# Altium PCB UPRISE3D-DW01(修改logo).PCBDOC (part 2 of 2)
Units mm, origin at the board's own origin, x right, y up, seen from the top; angles counter-clockwise.
Board outline 89.99 x 190.32 mm, 2 copper layers (Top Layer, Bottom Layer); 201 components, 175 nets, 672 pads, 420 vias.
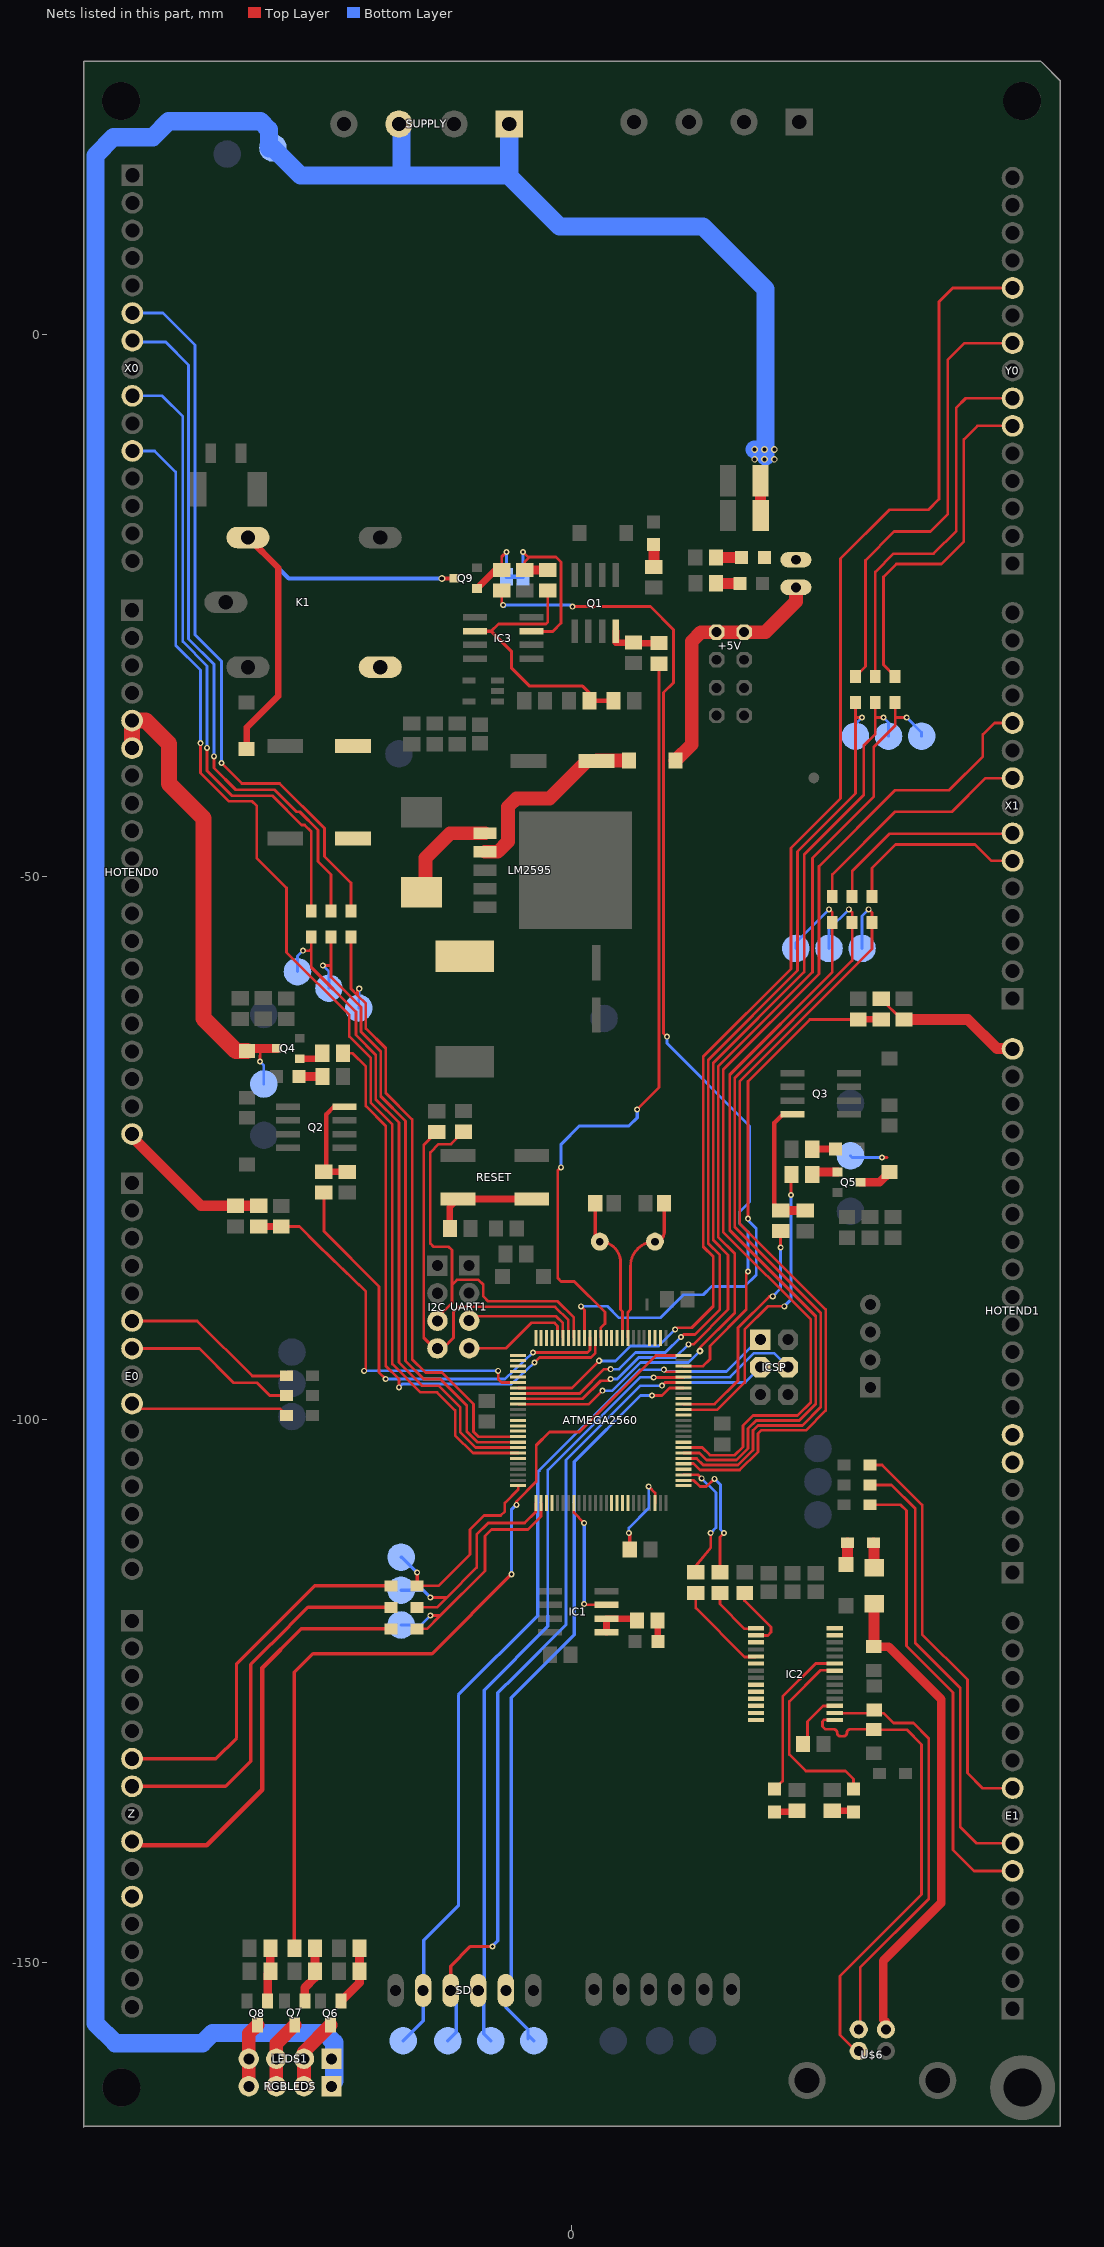
[diagram p2: the nets of this part, all layers, seen from the top]

## Via types
v1: diameter 0.555, hole 0.3, Top Layer to Bottom Layer, tented both sides, 375 vias
v2: diameter 0.656, hole 0.406, Top Layer to Bottom Layer, tented both sides, 26 vias
v3: diameter 0.606, hole 0.356, Top Layer to Bottom Layer, tented both sides, 14 vias
v4: diameter 0.6, hole 0.3, Top Layer to Bottom Layer, tented both sides, 1 vias
v5: diameter 0.61, hole 0.3, Top Layer to Bottom Layer, tented both sides, 1 vias
v6: diameter 0.61, hole 0.305, Top Layer to Bottom Layer, tented both sides, 1 vias
v7: diameter 2.184, hole 1.016, Top Layer to Bottom Layer, 1 vias
v8: diameter 0.555, hole 0.3, Top Layer to Bottom Layer, 1 vias

## Nets (pads, with @x,y where several pads share a name; then routed paths per layer and width w, separated by ;. In a path a pad name is that pad's centre, name@x,y a point inside that pad or via, vN(x,y) a via of type N, cw(c..) or ccw(c..) an arc to the next point about the centre after c; other vN are vias at no path point) (continued)
LFAN0: D7.A HOTEND0.5 HOTEND0.6 Q4.3 TP9.TP | length 45.1
  Top Layer w0.254: v1(-28.727,-67) -28.703,-65.795 -28.702,-65.735
  Top Layer w0.813: D7.A@-29.907,-66.033 -29.669,-65.795 -28.703,-65.795 Q4.3@-27.166,-65.795
  Top Layer w1.5: HOTEND0.6@-40.513,-38.125 HOTEND0.5@-40.513,-35.585 -39.243,-35.585 -37.109,-37.719 -37.109,-41.402 -33.934,-44.577 -33.934,-63.043 -30.944,-66.033 D7.A@-29.907,-66.033
  Bottom Layer w0.254: v1(-28.727,-67) -28.372,-67.356 TP9.TP@-28.372,-69.074
LFAN1: D9.A HOTEND1.5 HOTEND1.6 Q5.3 TP10.TP | length 6.5
  Top Layer w0.305: v1(28.575,-75.84) 29.032,-75.84
  Top Layer w0.813: Q5.3@26.59,-78.128 28.351,-78.128 D9.A@29.288,-77.191
  Bottom Layer w0.254: TP10.TP@25.679,-75.687 25.832,-75.84 v1(28.575,-75.84)
LMIN: C8.+ D2.C LM2595.2 | length 18.6
  Top Layer w1.27: LM2595.2@-7.998,-47.68 -6.816,-47.68 -5.867,-46.731 -5.867,-43.531 -5.105,-42.769 -2.057,-42.769 1.39,-39.322 C8.+@2.273,-39.322 2.316,-39.279 D2.C@5.264,-39.279
MISO: ATMEGA2560.22 ICSP.1 SD.2 TP20.TP | length 84.9
  Top Layer w0.254: v1(8.484,-95.398) 8.691,-95.58 ATMEGA2560.22@10.297,-95.58
  Bottom Layer w0.254: -2.972,-104.643 6.274,-95.398 v1(8.484,-95.398) 8.534,-95.575 14.249,-95.575 17.203,-92.622 ICSP.1@17.377,-92.622
  Bottom Layer w0.305: TP20.TP@-15.535,-157.228 -13.699,-155.391 SD.2@-13.699,-152.585 SD.2@-13.62,-152.585 ; SD.2@-13.64,-152.273 -13.64,-147.98 -10.439,-144.78 -10.439,-125.37 -3.124,-118.054 -3.124,-104.796 -2.972,-104.643
MLED: ATMEGA2560.83 IC1.3 | length 11.8
  Top Layer w0.254: ATMEGA2560.83@0.188,-107.695 0.188,-108.565 v1(1.143,-109.52) ; v1(1.143,-116.988) 1.218,-117.063 IC1.3@3.197,-117.063
  Bottom Layer w0.305: v1(1.143,-116.988) v1(1.143,-109.52)
MOSI: ATMEGA2560.21 ICSP.4 SD.4 TP17.TP | length 86.1
  Top Layer w0.203: ATMEGA2560.21@10.276,-96.109 ATMEGA2560.21@10.297,-96.088
  Top Layer w0.254: v1(7.544,-96.109) ATMEGA2560.21@10.276,-96.109
  Bottom Layer w0.203: v1(7.544,-96.109) 7.87,-96.088
  Bottom Layer w0.254: -2.21,-118.054 -2.21,-104.643 6.346,-96.088 7.544,-96.088 7.87,-96.088 14.575,-96.088 16.789,-93.874 18.629,-93.874 ICSP.4@19.917,-95.162
  Bottom Layer w0.305: SD.4@-8.576,-152.542 SD.4@-8.619,-152.585 -8.992,-152.213 -8.619,-152.213 SD.4@-8.576,-152.213 ; SD.4@-8.111,-152.585 -8.111,-156.575 TP17.TP@-7.458,-157.228 ; SD.4@-8.068,-152.213 -8.068,-124.912 -2.21,-119.054 -2.21,-118.054
N$1: C19.1 IC2.2 | length 6.2
  Top Layer w0.254: C19.1@15.924,-115.956 15.924,-116.681 18.364,-119.121 18.364,-119.578 18.059,-119.883 16.976,-119.883 IC2.2@16.967,-119.875
N$2: ATMEGA2560.98 C6.1 | length 8.4
  Top Layer w0.254: v1(7.087,-106.167) 7.681,-106.761 ATMEGA2560.98@7.681,-107.695
  Top Layer w0.305: v1(5.258,-110.434) 5.336,-110.513 C6.1@5.336,-111.955
  Bottom Layer w0.254: v1(5.258,-110.434) 5.258,-109.977 7.087,-108.148 v1(7.087,-106.167)
N$3: ATMEGA2560.35
N$4: ATMEGA2560.14
N$5: L12.1 X0.6 | length 67.1
  Top Layer w0.254: v1(-32.283,-39.497) -30.404,-41.377 -26.919,-41.377 -22.784,-45.512 -22.784,-48.103 -20.345,-50.541 L12.1@-20.345,-53.151
  Bottom Layer w0.254: X0.6@-40.488,1.956 -37.668,1.956 -34.722,-0.991 -34.722,-27.686 -32.283,-30.124 v1(-32.283,-39.497)
N$6: IC2.23 TXLED.C | length 14.9
  Top Layer w0.254: TXLED.C@18.691,-134.036 19.431,-133.296 19.431,-125.522 22.479,-122.474 IC2.23@24.218,-122.474
N$7: IC2.22 RXLED.C | length 18
  Top Layer w0.254: IC2.22@24.218,-123.124 24.176,-123.084 22.936,-123.084 20.041,-125.979 20.041,-130.856 21.565,-132.38 25.222,-132.38 25.951,-133.109 RXLED.C@25.951,-134.036
N$8: IC2.3
N$9: LEDS1.2 Q6.3 RGBLEDS.2 | length 6.7
  Top Layer w1.27: RGBLEDS.2@-24.681,-161.421 LEDS1.2@-24.681,-158.894 -24.681,-158.239 Q6.3@-22.218,-155.776
N$10: LEDS1.3 Q7.3 RGBLEDS.3 | length 6.4
  Top Layer w1.27: RGBLEDS.3@-27.221,-161.421 LEDS1.3@-27.221,-158.894 -27.221,-157.466 Q7.3@-25.523,-155.768
N$11: LEDS1.4 Q8.3 RGBLEDS.4 | length 6.6
  Top Layer w1.016: LEDS1.4@-29.761,-159.514 LEDS1.4@-29.761,-158.894
  Top Layer w1.27: RGBLEDS.4@-29.761,-161.421 LEDS1.4@-29.761,-158.894 -29.761,-156.561 Q8.3@-28.97,-155.771
N$12: IC2.11
N$13: R32.2 RESET.B RESET.B' | length 9.8
  Top Layer w0.61: R32.2@-11.237,-82.393 -11.237,-80.419 RESET.B'@-10.487,-79.668 RESET.B@-3.687,-79.668
N$14: IC2.9
N$15: IC2.10
N$16: IC2.6
N$17: IC2.13
N$18: IC2.14
N$19: IC2.12
N$20: IC2.27
N$21: IC2.28
N$22: ATMEGA2560.47
N$23: D8.A L2.2 | length 2.1
  Top Layer w1.016: D8.A@25.274,-113.351 25.394,-113.231 L2.2@25.394,-111.349
N$24: ATMEGA2560.78
N$26: IC1.1 IC1.2 R3.2 | length 4.1
  Top Layer w0.61: IC1.1@3.197,-119.603 IC1.2@3.197,-118.333 5.835,-118.333 R3.2@6.005,-118.502
N$27: Q6.1 R18.1 R20.1 | length 5.6
  Top Layer w0.813: Q6.1@-21.268,-153.576 -19.548,-151.855 R18.1@-19.548,-150.827 R20.1@-19.548,-148.693
N$28: R3.1 STAT.A | length 1.9
  Top Layer w0.61: R3.1@7.904,-118.502 7.904,-119.95 STAT.A@7.929,-120.432
N$29: ATMEGA2560.53
N$31: Q7.1 R21.1 R31.1 | length 5.3
  Top Layer w0.813: Q7.1@-24.573,-153.568 -24.613,-153.528 -24.613,-152.351 -23.663,-151.401 R31.1@-23.663,-150.827 R21.1@-23.663,-148.693
N$32: Q8.1 R22.1 R40.1 | length 5
  Top Layer w0.813: Q8.1@-28.021,-153.571 -28.021,-151.07 R40.1@-27.777,-150.827 R22.1@-27.777,-148.693
N$33: ATMEGA2560.54
N$34: L13.1 X0.7 | length 64
  Top Layer w0.254: v1(-32.969,-38.887) -32.969,-39.954 -30.963,-41.961 -27.381,-41.961 -25.352,-43.99 -25.068,-43.99 -23.393,-45.664 -23.393,-48.56 -22.174,-49.779 L13.1@-22.174,-53.151
  Bottom Layer w0.254: X0.7@-40.361,-0.711 -37.414,-0.711 -35.306,-2.819 -35.306,-28.067 -32.969,-30.404 v1(-32.969,-38.887)
N$35: L14.1 X0.9 | length 58.3
  Top Layer w0.254: v1(-33.604,-38.1) -33.604,-40.208 -31.293,-42.52 -27.584,-42.52 -24.897,-45.207 -24.613,-45.207 -24.003,-45.817 L14.1@-24.003,-53.151
  Bottom Layer w0.254: X0.9@-40.488,-5.664 -37.744,-5.664 -35.839,-7.569 -35.839,-28.321 -33.604,-30.556 v1(-33.604,-38.1)
N$36: L18.1 Y0.6 | length 32.8
  Top Layer w0.254: L18.1@29.794,-31.51 28.727,-30.444 28.727,-22.347 29.906,-21.169 34.051,-21.169 36.119,-19.101 36.119,-9.703 37.389,-8.433 Y0.6@40.615,-8.433
N$37: L19.1 Y0.7 | length 35.5
  Top Layer w0.254: L19.1@27.965,-31.51 27.965,-21.89 29.642,-20.214 33.33,-20.214 35.433,-18.11 35.433,-6.756 36.297,-5.893 Y0.7@40.615,-5.893
N$38: ATMEGA2560.9
N$39: L20.1 Y0.9 | length 41.3
  Top Layer w0.254: L20.1@26.137,-31.51 27.051,-30.596 27.051,-20.823 29.705,-18.169 33.038,-18.169 34.646,-16.561 34.646,-2.337 36.17,-0.813 Y0.9@40.615,-0.813
N$40: L15.1 X1.6 | length 17.1
  Top Layer w0.254: L15.1@27.661,-51.78 27.661,-49.17 29.816,-47.015 37.159,-47.015 38.659,-48.514 X1.6@40.615,-48.514
N$41: L16.1 X1.7 | length 18.5
  Top Layer w0.254: L16.1@25.832,-51.78 25.832,-49.474 29.296,-46.01 X1.7@40.579,-46.01
N$42: L17.1 X1.9 | length 22.3
  Top Layer w0.254: L17.1@24.003,-51.78 24.003,-49.779 29.794,-43.988 35.031,-43.988 38.125,-40.894 X1.9@40.615,-40.894
N$43: E0.6 L6.2 | length 16.6
  Top Layer w0.254: E0.6@-40.513,-90.907 -34.519,-90.907 -29.435,-95.99 -26.27,-95.99 -26.151,-95.99 L6.2@-26.27,-95.956
N$44: E0.7 L7.2 | length 16
  Top Layer w0.254: E0.7@-40.513,-93.447 -34.315,-93.447 -31.166,-96.596 -29.019,-96.596 -27.831,-97.785 L7.2@-26.27,-97.785
N$45: E0.9 L8.2 | length 14.2
  Top Layer w0.254: E0.9@-40.253,-98.99 -26.894,-98.99 L8.2@-26.27,-99.614
N$46: ATMEGA2560.17
N$47: ATMEGA2560.55
N$48: F3.2 L2.1 | length 2.3
  Top Layer w1.016: L2.1@27.794,-111.349 27.855,-111.41 F3.2@27.855,-113.639
N$49: IC3.2 R1.2 R42.1 R44.1 | length 25.2
  Top Layer w0.254: -7.417,-27.351 -6.756,-26.691 -2.388,-26.691 -2.21,-26.513 R44.1@-2.21,-23.602
  Top Layer w0.305: IC3.2@-8.925,-27.351 -7.417,-27.351 -5.563,-29.205 -5.563,-30.729 -3.886,-32.406 0.991,-32.406 1.636,-33.051 R42.1@1.636,-33.777
  Top Layer w0.406: R42.1@1.636,-33.777 R1.2@3.851,-33.777
N$50: ATMEGA2560.4
N$54: L3.1 Z.6 | length 34.4
  Top Layer w0.305: Z.6@-40.513,-131.242 -32.791,-131.242 -30.886,-129.337 -30.886,-122.499 -23.698,-115.311 L3.1@-16.668,-115.311
N$55: L4.1 Z.7 | length 35.9
  Top Layer w0.305: Z.7@-40.513,-133.782 -31.902,-133.782 -29.591,-131.47 -29.591,-122.555 -27.728,-120.692 -27.707,-120.692 -24.308,-117.292 L4.1@-16.668,-117.292
N$56: L5.1 Z.9 | length 38.5
  Top Layer w0.305: -26.84,-121.196 -24.917,-119.274 L5.1@-16.668,-119.274
  Top Layer w0.406: Z.9@-40.361,-139.217 -33.63,-139.217 -28.524,-134.112 -28.524,-122.88 -26.84,-121.196
N$57: E1.9 L11.1 | length 37.5
  Top Layer w0.254: L11.1@27.489,-104.186 28.596,-104.186 32.283,-107.874 32.283,-119.786 36.449,-123.952 36.449,-132.563 37.846,-133.96 E1.9@40.615,-133.96
N$58: E1.7 L10.1 | length 41.6
  Top Layer w0.254: L10.1@27.489,-106.015 29.459,-106.015 31.648,-108.204 31.648,-120.574 35.789,-124.714 35.789,-137.516 37.313,-139.04 E1.7@40.615,-139.04
N$59: E1.6 L9.1 | length 42.9
  Top Layer w0.254: L9.1@27.489,-107.844 30.297,-107.844 30.836,-108.382 30.836,-120.853 35.128,-125.146 35.128,-139.649 37.059,-141.58 E1.6@40.615,-141.58
N$63: LED1.C R2.2 | length 2
  Top Layer w1.016: LED1.C@7.531,-19.373 7.556,-20.313 R2.2@7.556,-21.422
N$66: Q1.4 R6.1 R7.1 | length 5.1
  Top Layer w0.61: Q1.4@4.08,-27.371 Q1.4@4.071,-27.362 4.071,-28.402 R7.1@5.682,-28.402 5.682,-28.451 R6.1@8.034,-28.451
N$69: ATMEGA2560.93
N$73: ATMEGA2560.92
N$74: ATMEGA2560.91
N$75: ATMEGA2560.90
N$76: C20.1 IC2.17 | length 5.3
  Top Layer w0.254: C20.1@21.301,-129.888 21.717,-129.473 21.717,-127.808 23.15,-126.375 IC2.17@24.218,-126.375
N$77: ATMEGA2560.51
N$78: ATMEGA2560.52
N$81: R33.1 TXLED.A | length 2.1
  Top Layer w0.61: TXLED.A@18.691,-136.136 R33.1@20.654,-136.136
  Top Layer w0.813: R33.1@20.654,-136.136 R33.1@20.755,-136.034
N$82: R34.1 RXLED.A | length 2
  Top Layer w0.61: R34.1@24.01,-136.034 25.85,-136.034 RXLED.A@25.951,-136.136
N$83: ATMEGA2560.70
N$90: Q4.1 R14.1 | length 2.3
  Top Layer w0.61: Q4.1@-25.065,-66.745 -23.489,-66.745 R14.1@-22.99,-66.245
N$91: LED2.C R8.2 | length 2.2
  Top Layer w0.813: LED2.C@-25.122,-68.384 R8.2@-22.97,-68.384
N$99: Q2.4 R9.1 R10.1 | length 9.5
  Top Layer w0.406: R9.1@-22.838,-77.162 -22.631,-76.956 -22.631,-71.877 -21.911,-71.157 Q2.4@-20.948,-71.157
  Top Layer w0.61: R9.1@-22.838,-77.162 -22.825,-77.176 R10.1@-20.697,-77.176
N$100: D4.A K1.2 Q9.3 | length 42.4
  Top Layer w0.406: v2(-11.963,-22.5) Q9.3@-10.87,-22.5
  Top Layer w0.61: D4.A@-29.953,-38.218 -29.953,-36.222 -27.051,-33.32 -27.051,-21.516 K1.2@-29.84,-18.726 ; Q9.3@-10.87,-22.5 Q9.3@-10.841,-22.47
  Bottom Layer w0.406: K1.2@-29.84,-18.726 -26.067,-22.5 v2(-11.963,-22.5)
N$101: ATMEGA2560.28
N$102: LED3.C R11.2 | length 2.2
  Top Layer w0.406: R11.2@22.159,-75.096 R11.2@22.172,-75.059
  Top Layer w0.61: R11.2@22.172,-75.059 LED3.C@24.285,-75.059
N$103: Q3.4 R12.1 R13.1 | length 12.6
  Top Layer w0.406: R12.1@19.242,-80.733 18.669,-80.161 18.669,-72.639 19.433,-71.876 Q3.4@20.328,-71.876
  Top Layer w0.813: R12.1@19.242,-80.733 19.251,-80.742 R13.1@21.525,-80.743
N$104: ATMEGA2560.48
N$105: ATMEGA2560.49
N$106: ATMEGA2560.50
N$107: Q5.1 R15.1 | length 2.5
  Top Layer w0.813: R15.1@22.159,-77.414 22.304,-77.178 Q5.1@24.49,-77.178
N$109: ATMEGA2560.29
N$113: ATMEGA2560.1
N$114: ATMEGA2560.63
N$122: ATMEGA2560.64
N$125: ATMEGA2560.27
N$126: ATMEGA2560.65
N$131: ATMEGA2560.79
N$141: ATMEGA2560.36
N$142: ATMEGA2560.37
N$147: ATMEGA2560.42
N$161: PWR24.C R38.2 | length 2.4
  Top Layer w1.016: R38.2@13.279,-20.571 13.29,-20.561 PWR24.C@15.639,-20.561
N$162: PWR5.C R39.2 | length 2.2
  Top Layer w1.016: R39.2@13.294,-22.939 13.32,-22.964 PWR5.C@15.487,-22.964
OUT: D1.C L1.A LM2595.1 | length 9.7
  Top Layer w1.016: D1.C@-13.859,-51.424 D1.C@-13.487,-50.443
  Top Layer w1.27: D1.C@-13.487,-50.443 -13.487,-48.255 -11.21,-45.978 LM2595.1@-7.998,-45.978
PWM_HOTBED: ATMEGA2560.38 R6.2 | length 71.3
  Top Layer w0.254: v1(-0.991,-76.754) -1.295,-77.059 -1.295,-86.965 -0.991,-87.27 0.229,-87.27 3.048,-90.089 3.048,-91.156 2.677,-91.527 ATMEGA2560.38@2.677,-92.455 ; v1(6.02,-71.42) 8.034,-69.406 R6.2@8.034,-30.351
  Bottom Layer w0.305: v1(-0.991,-76.754) -0.991,-74.62 0.686,-72.944 5.258,-72.944 6.02,-72.182 v1(6.02,-71.42)
PWM_HOTEND0: ATMEGA2560.40 R9.2 | length 40.6
  Top Layer w0.254: R9.2@-22.838,-79.062 -22.838,-82.643 -17.755,-87.727 -17.755,-95.652 v1(-17.145,-96.261) ; v1(-3.581,-93.823) 1.448,-93.823 1.686,-93.584 ATMEGA2560.40@1.686,-92.455
  Bottom Layer w0.254: v1(-17.145,-96.261) -6.172,-96.261 v1(-3.581,-93.823)
PWM_HOTEND1: ATMEGA2560.16 R12.2 | length 21.5
  Top Layer w0.254: ATMEGA2560.16@10.297,-98.577 13.153,-98.577 15.316,-96.414 15.316,-91.537 18.212,-88.641 v1(18.517,-88.641) ; v1(19.242,-84.132) R12.2@19.242,-82.633
  Bottom Layer w0.254: v1(18.517,-88.641) 19.242,-87.916 v1(19.242,-84.132)
PWM_LFAN0: ATMEGA2560.39 R14.2 | length 54.2
  Top Layer w0.254: R14.2@-21.09,-66.245 -21.083,-66.238 -20.193,-66.238 -18.974,-67.458 -18.974,-71.115 -17.145,-72.944 -17.145,-95.042 -15.926,-96.261 v1(-15.926,-97.023) ; v1(-3.429,-94.737) -2.972,-94.28 1.753,-94.28 2.169,-93.864 ATMEGA2560.39@2.169,-92.455
  Bottom Layer w0.254: v1(-15.926,-97.023) -15.621,-96.718 -5.563,-96.718 v1(-3.429,-94.737)
PWM_LFAN1: ATMEGA2560.15 R15.2 | length 28.6
  Top Layer w0.254: ATMEGA2560.15@10.297,-99.085 10.301,-99.081 13.411,-99.081 15.926,-96.566 15.926,-91.689 18.059,-89.556 v1(19.583,-89.556)
  Top Layer w0.305: v1(20.193,-79.293) 20.193,-77.414 R15.2@20.259,-77.414
  Bottom Layer w0.305: v1(19.583,-89.556) 20.193,-88.946 v1(20.193,-79.293)
R-PWM: ATMEGA2560.25 R21.2 | length 79
  Top Layer w0.254: v1(-5.105,-107.844) -5.105,-107.539 -3.277,-105.71 -3.277,-102.357 -2.057,-101.138 0.686,-101.138 7.743,-94.081 ATMEGA2560.25@10.297,-94.081
  Top Layer w0.305: R21.2@-25.563,-148.693 -25.563,-123.272 -23.851,-121.56 -12.878,-121.56 v1(-5.563,-114.244)
  Bottom Layer w0.305: v1(-5.563,-114.244) -5.563,-108.301 v1(-5.105,-107.844)
RELAY: ATMEGA2560.23 R19.2 | length 94
  Top Layer w0.254: R19.2@-6.451,-23.602 -6.451,-24.811 v1(-6.325,-24.938) ; v1(0.076,-25.09) 7.239,-25.09 9.373,-27.224 9.373,-32.101 8.458,-33.015 8.458,-64.41 v1(8.763,-64.714) ; ATMEGA2560.23@10.297,-95.072 12.086,-95.072 12.725,-94.432 12.725,-93.213 16.078,-89.86 16.078,-86.508 v1(16.231,-86.355)
  Bottom Layer w0.254: v1@-6.172,-25.09 v1(-6.325,-24.938) -0.076,-24.938 v1(0.076,-25.09) ; v1(8.763,-64.714) 8.763,-65.324 16.383,-72.944 16.383,-79.954 15.469,-80.869 15.469,-81.936 16.231,-82.698 v1(16.231,-86.355)
RELAYINA: IC3.7 Q9.1 R19.1 R43.2 R44.2 SJ1.1 SJ1.2 | length 27
  Top Layer w0.254: R19.1@-6.451,-21.702 -6.451,-20.493 v1(-6.02,-20.061) ; v1(-4.496,-20.061) -4.039,-20.518 -3.886,-20.518 ; R43.2@-4.343,-21.702 -4.343,-20.976 -3.886,-20.518 ; IC3.7@-3.725,-27.351 -3.699,-27.376 -1.753,-27.376 -0.991,-26.614 -0.991,-20.976 -1.448,-20.518 -3.886,-20.518
  Top Layer w0.61: Q9.1@-8.741,-23.42 -7.023,-21.702 R19.1@-6.451,-21.702
  Top Layer w0.813: R43.2@-4.343,-21.702 R44.2@-2.21,-21.702
  Bottom Layer w0.254: SJ1.2@-6.02,-22.347 v1(-6.02,-20.061) ; SJ1.1@-4.496,-22.347 v1(-4.496,-20.061)
  Bottom Layer w0.406: SJ1.2@-6.02,-22.347 SJ1.1@-4.496,-22.347
RX: IC2.1 R35.2 | length 5.3
  Top Layer w0.254: R35.2@13.649,-115.956 13.649,-116.997 15.926,-119.274 16.919,-119.274 IC2.1@16.967,-119.225
RX1: ATMEGA2560.45 UART1.3 | length 10.4
  Top Layer w0.254: UART1.3@-9.45,-90.88 -9.04,-90.47 -1.448,-90.47 -0.828,-91.089 ATMEGA2560.45@-0.828,-92.455
SCL: ATMEGA2560.43 I2C.3 R4.2 | length 36.9
  Top Layer w0.254: I2C.3@-12.379,-90.894 -12.379,-90.581 -11.049,-89.251 -11.049,-87.574 ; R4.2@-9.98,-73.475 -11.125,-74.62 -12.268,-74.62 -13.03,-75.382 -13.03,-83.764 -12.725,-84.069 -11.354,-84.069 -11.049,-84.374 -11.049,-87.574 ; ATMEGA2560.43@0.188,-92.455 0.188,-90.581 -1.295,-89.098 -7.696,-89.098 -8.153,-88.641 -8.153,-87.574 -8.611,-87.117 -10.592,-87.117 -11.049,-87.574
SCLK: ATMEGA2560.20 ICSP.3 SD.3 TP19.TP | length 83
  Top Layer w0.254: v1(8.306,-96.871) 8.606,-96.57 ATMEGA2560.20@10.297,-96.57
  Top Layer w0.305: SD.3@-11.159,-152.585 -11.167,-152.578 -11.167,-150.37 -9.338,-148.541 v1(-7.316,-148.54)
  Bottom Layer w0.254: -0.533,-108.301 -0.533,-103.729 6.325,-96.871 v1(8.306,-96.871) 8.611,-96.566 10.301,-96.566 ; 10.297,-96.57 10.301,-96.566 ; ICSP.3@17.377,-95.162 15.974,-96.566 10.301,-96.566
  Bottom Layer w0.305: TP19.TP@-11.421,-157.228 -10.651,-156.458 SD.3@-10.651,-152.585 ; v1(-7.316,-148.54) -6.808,-148.032 -6.808,-125.172 -5.177,-123.541 -5.172,-123.541 -0.533,-118.902 -0.533,-108.301
SDA: ATMEGA2560.44 I2C.4 R5.2 | length 38.3
  Top Layer w0.254: R5.2@-12.436,-73.488 -13.64,-74.691 -13.64,-92.451 -12.657,-93.434 I2C.4@-12.379,-93.434 -11.88,-93.434 -10.897,-92.451 -10.897,-90.064 -10.439,-89.606 -1.549,-89.606 -0.32,-90.835 ATMEGA2560.44@-0.32,-92.455
SDSS: ATMEGA2560.19 SD.5 TP16.TP | length 70.1
  Top Layer w0.254: v1(7.391,-97.785) 8.306,-97.785 9.013,-97.078 ATMEGA2560.19@10.297,-97.078
  Bottom Layer w0.254: 0.229,-103.881 6.325,-97.785 v1(7.391,-97.785)
  Bottom Layer w0.305: SD.5@-6.079,-152.585 -6.079,-154.119 -4.039,-156.159 TP16.TP@-4.039,-156.685 ; SD.5@-5.571,-152.585 -5.571,-125.616 0.229,-119.816 0.229,-103.881 ; TP16.TP@-4.039,-157.074 TP16.TP@-4.039,-156.685 ; TP16.TP@-3.496,-157.228 TP16.TP@-4.039,-156.685
SUPPLY: C12.+ C13.+ C14.1 C16.1 K1.S LEDS1.1 PWR24.A RGBLEDS.1 SUPPLY.1 SUPPLY.3 TP2.TP VCC2.1 | length 298.2
  Top Layer w1.016: C16.1@17.399,-16.694 C14.1@17.398,-13.5
  Bottom Layer w1.676: TP2.TP@-27.889,17.145 -27.889,17.17 -27.889,18.847 -28.677,19.634 -37.135,19.634 -38.608,18.161 -42.215,18.161 -43.891,16.485 -43.891,-155.626 -42.062,-157.455 -34.036,-157.455 -33.096,-156.515 -22.758,-156.515 -21.895,-157.378 -21.895,-158.894 RGBLEDS.1@-21.895,-160.934 ; TP2.TP@-27.534,17.17 -24.994,14.63 -15.469,14.63 ; SUPPLY.3@-15.697,19.355 -15.697,14.859 -15.469,14.63 ; -5.969,14.63 -15.469,14.63 ; SUPPLY.1@-5.766,19.38 -5.766,14.58 -1.118,9.931 12.09,9.931 17.856,4.166 17.856,-10.612 v3@17.856,-11.252 ; v3(16.84,-10.612) v3(17.755,-10.612)
  other v3: 16.84,-11.527 17.755,-11.527 18.669,-11.527 18.669,-10.612
TX: IC2.5 R36.2 | length 8.8
  Top Layer w0.254: R36.2@11.43,-115.956 11.43,-117.369 15.926,-121.864 16.928,-121.864 IC2.5@16.967,-121.824
TX1: ATMEGA2560.46 UART1.4 | length 10.3
  Top Layer w0.254: UART1.4@-9.45,-93.42 -6.074,-93.42 -3.734,-91.08 -1.6,-91.08 -1.311,-91.369 ATMEGA2560.46@-1.311,-92.455
UART_N: ATMEGA2560.3 R36.1 | length 11.7
  Top Layer w0.254: ATMEGA2560.3@10.297,-105.079 11.638,-105.079 v1(11.963,-105.405) ; R36.1@11.43,-114.056 11.43,-113.482 12.802,-111.806 v1(12.802,-110.434)
  Bottom Layer w0.254: v1(11.963,-105.405) 13.284,-106.726 13.284,-109.952 v1(12.802,-110.434)
UART_P: ATMEGA2560.2 R35.1 | length 12.5
  Top Layer w0.254: ATMEGA2560.2@10.297,-105.587 11.231,-105.587 11.811,-106.167 12.421,-106.167 v1(13.138,-105.45) ; R35.1@13.649,-114.056 13.649,-110.806 v1(14.021,-110.434)
  Bottom Layer w0.254: v1(13.138,-105.45) 13.691,-106.002 13.691,-110.104 v1(14.021,-110.434)
USBD+_P: IC2.15 R23.1 U$6.D+ | length 44.5
  Top Layer w0.203: IC2.15@24.199,-127.656 IC2.15@24.218,-127.675 ; 24.447,-128.868 24.447,-128.829 ; 25.345,-128.868 25.345,-128.829 ; R23.1@27.813,-128.537 R23.1@27.846,-128.57
  Top Layer w0.254: IC2.15@24.199,-127.656 23.241,-127.656 23.089,-127.808 23.089,-128.265 23.36,-128.537 24.155,-128.537 cw(c24.155,-128.829) 24.447,-128.829 ; 24.447,-128.868 ccw(c24.74,-128.868) 24.74,-129.16 25.053,-129.16 ccw(c25.053,-128.868) 25.345,-128.868 ; 25.345,-128.829 cw(c25.637,-128.829) 25.637,-128.537 R23.1@27.813,-128.537 ; U$6.D+@26.441,-158.166 26.187,-158.166 24.714,-156.693 24.714,-151.257 32.233,-143.739 32.233,-129.921 30.882,-128.57 R23.1@27.846,-128.57
USBD-_N: IC2.16 R24.1 U$6.D- | length 39.2
  Top Layer w0.254: IC2.16@24.218,-127.025 24.239,-127.046 27.864,-127.046 28.727,-127.046 29.642,-127.96 31.466,-127.96 32.893,-129.388 32.893,-144.17 26.568,-150.495 26.568,-156.185 U$6.D-@26.568,-156.362
VBUS: F3.1 R25.1 U$6.VBUS | length 44.3
  Top Layer w0.813: R25.1@27.813,-120.917 29.197,-120.917 34.036,-125.755 34.036,-144.526 28.702,-149.86 28.702,-155.27 U$6.VBUS@28.956,-155.524
  Top Layer w1.016: R25.1@27.813,-120.917 27.855,-120.875 F3.1@27.855,-116.947
VCC2: +5V.1 +5V.3 D2.A VCC2.2 | length 24.1
  Top Layer w0.356: +5V.1@13.32,-27.417 +5V.1@13.345,-27.443
  Top Layer w1.27: D2.A@9.564,-39.279 11.049,-37.794 11.049,-28.291 11.897,-27.443 +5V.1@13.345,-27.443 +5V.3@15.885,-27.443 17.841,-27.443 20.65,-24.633 VCC2.2@20.65,-23.312
X0-!EN: ATMEGA2560.67 L13.2 TP22.TP | length 59.8
  Top Layer w0.254: v1(-22.936,-58.161) -22.174,-58.161 ; L13.2@-22.174,-55.551 -22.174,-58.161 ; ATMEGA2560.67@-4.943,-102.082 -8.674,-102.082 -9.677,-101.079 -9.677,-98.7 -12.116,-96.261 -13.64,-96.261 -15.316,-94.585 -15.316,-72.487 -17.602,-70.201 -17.602,-66.086 -19.431,-64.257 -19.431,-61.971 -22.174,-59.228 -22.174,-58.161
  Bottom Layer w0.254: v1(-22.936,-58.161) -22.377,-58.72 TP22.TP@-22.377,-60.244
X0-DIR: ATMEGA2560.68 L14.2 TP23.TP | length 61.1
  Top Layer w0.254: v1(-24.765,-56.79) -24.155,-56.79 -24.003,-56.637 ; L14.2@-24.003,-55.551 -24.003,-56.637 ; ATMEGA2560.68@-4.943,-102.565 -8.86,-102.565 -10.287,-101.138 -10.287,-98.852 -12.268,-96.871 -13.792,-96.871 -15.926,-94.737 -15.926,-72.639 -18.059,-70.506 -18.059,-66.391 -19.888,-64.562 -19.888,-62.428 -24.003,-58.314 -24.003,-56.637
  Bottom Layer w0.254: TP23.TP@-25.273,-58.72 -25.273,-57.298 v1(-24.765,-56.79)
X0-STEP: ATMEGA2560.66 L12.2 TP21.TP | length 57.9
  Top Layer w0.254: L12.2@-20.345,-55.551 -20.345,-60.295 -19.736,-60.904 ; v1(-19.583,-60.295) -19.736,-60.447 -19.736,-60.904 ; ATMEGA2560.66@-4.943,-101.574 -8.611,-101.574 -9.068,-101.117 -9.068,-98.547 -11.963,-95.652 -13.487,-95.652 -14.707,-94.432 -14.707,-72.334 -17.145,-69.896 -17.145,-65.781 -18.974,-63.952 -18.974,-61.666 -19.736,-60.904
  Bottom Layer w0.254: TP21.TP@-19.634,-62.073 v1(-19.583,-60.295)
X0-STOP: ATMEGA2560.69 X0.11 | length 112.9
  Top Layer w0.254: v1(-34.214,-37.668) -34.214,-40.411 -31.598,-43.028 -29.439,-43.028 -29.035,-43.431 -29.035,-48.253 -26.289,-50.998 -26.289,-56.942 -20.498,-62.733 -20.498,-64.714 -18.517,-66.696 -18.517,-70.81 -16.535,-72.792 -16.535,-94.89 -13.945,-97.48 -12.421,-97.48 -10.744,-99.157 -10.744,-101.443 -9.114,-103.073 ATMEGA2560.69@-4.943,-103.073
  Bottom Layer w0.254: X0.11@-40.488,-10.744 -38.43,-10.744 -36.5,-12.675 -36.5,-28.651 -34.214,-30.937 v1(-34.214,-37.668)
X1-!EN: ATMEGA2560.6 L16.2 TP25.TP | length 74.3
  Top Layer w0.254: ATMEGA2560.6@10.297,-103.581 10.301,-103.576 11.506,-103.576 12.116,-104.186 15.316,-104.186 16.688,-102.814 16.688,-100.986 17.145,-100.528 21.26,-100.528 22.936,-98.852 22.936,-90.165 15.011,-82.24 15.011,-68.524 25.832,-57.704 L16.2@25.832,-54.179 25.832,-53.284 v1(25.527,-52.98)
  Bottom Layer w0.254: TP25.TP@23.698,-56.586 23.698,-54.808 v1(25.527,-52.98)
X1-DIR: ATMEGA2560.7 L17.2 TP26.TP | length 73.9
  Top Layer w0.254: ATMEGA2560.7@10.297,-103.073 11.765,-103.073 12.421,-103.729 15.164,-103.729 16.231,-102.662 16.231,-100.833 16.993,-100.071 20.955,-100.071 22.479,-98.547 22.479,-90.47 14.554,-82.545 14.554,-68.22 24.003,-58.771 L17.2@24.003,-54.179 ; L17.2@23.698,-53.875 L17.2@24.003,-54.179 ; v1(23.698,-52.98) 24.003,-53.284 L17.2@24.003,-54.179
  Bottom Layer w0.254: TP26.TP@20.65,-56.586 20.65,-56.028 v1(23.698,-52.98)
X1-STEP: ATMEGA2560.5 L15.2 TP24.TP | length 75.1
  Top Layer w0.254: ATMEGA2560.5@10.297,-104.063 10.327,-104.034 11.201,-104.034 11.811,-104.643 15.469,-104.643 17.145,-102.967 17.145,-101.29 17.45,-100.986 21.565,-100.986 23.393,-99.157 23.393,-89.86 15.469,-81.936 15.469,-68.829 27.661,-56.637 L15.2@27.661,-54.179 27.661,-53.284 v1(27.356,-52.98)
  Bottom Layer w0.254: TP24.TP@26.746,-56.586 26.746,-53.589 v1(27.356,-52.98)
X1-STOP: ATMEGA2560.8 X1.11 | length 96.1
  Top Layer w0.254: ATMEGA2560.8@10.297,-102.565 12.019,-102.565 12.725,-103.272 15.011,-103.272 15.773,-102.51 15.773,-100.528 16.688,-99.614 20.803,-99.614 22.022,-98.395 22.022,-90.775 13.945,-82.698 13.945,-67.762 22.784,-58.923 22.784,-49.017 29.791,-42.01 34.749,-42.01 37.871,-38.887 37.871,-36.881 38.938,-35.814 X1.11@40.615,-35.814
XTAL_N: ATMEGA2560.33 C1.1 Y1.2 | length 14.3
  Top Layer w0.254: ATMEGA2560.33@5.166,-92.455 5.166,-90.104 5.41,-89.86 5.41,-85.85 cw(c7.662,-85.85) Y1.2@7.662,-83.599
  Top Layer w0.305: Y1.2@7.662,-83.599 ccw(c7.662,-82.752) 8.508,-82.752 C1.1@8.508,-80.059
XTAL_P: ATMEGA2560.34 C2.1 Y1.1 | length 13.8
  Top Layer w0.152: ATMEGA2560.34@4.648,-92.455 ATMEGA2560.34@4.684,-92.455
  Top Layer w0.254: Y1.1@2.582,-83.599 cw(c2.582,-85.512) 4.496,-85.512 4.496,-89.86 4.684,-90.048 ATMEGA2560.34@4.684,-92.455
  Top Layer w0.305: C2.1@2.165,-80.059 2.165,-83.181 ccw(c2.582,-83.181) Y1.1@2.582,-83.599
Y-!EN: ATMEGA2560.59 L19.2 TP28.TP | length 88.1
  Top Layer w0.254: ATMEGA2560.59@-4.943,-98.069 1.012,-98.069 2.667,-96.414 3.429,-96.414 v1(3.581,-96.261) ; v1(10.744,-93.061) 11.201,-93.061 14.402,-89.86 14.402,-84.831 13.03,-83.46 13.03,-67.153 21.412,-58.771 21.412,-47.95 26.899,-42.464 26.899,-37.892 27.965,-36.825 27.965,-35.301 ; L19.2@27.965,-33.91 27.965,-35.301 ; v1(28.727,-35.301) 27.965,-35.301
  Bottom Layer w0.254: v1(3.581,-96.261) 4.191,-96.261 6.172,-94.28 9.525,-94.28 v1(10.744,-93.061) ; v1(28.727,-35.301) 29.185,-35.758 TP28.TP@29.185,-37.028
Y-DIR: ATMEGA2560.58 L20.2 TP29.TP | length 86.4
  Top Layer w0.254: ATMEGA2560.58@-4.943,-97.586 0.732,-97.586 2.972,-95.347 v1(3.581,-95.347) ; v1(10.058,-92.375) 10.287,-92.146 11.354,-92.146 13.64,-89.86 13.64,-84.831 12.573,-83.764 12.573,-66.848 20.803,-58.618 20.803,-47.646 26.137,-42.312 26.137,-35.301 ; L20.2@26.137,-33.91 26.137,-35.301 ; v1(26.746,-35.301) 26.137,-35.301
  Bottom Layer w0.254: v1(3.581,-95.347) 4.343,-95.347 5.867,-93.823 8.611,-93.823 v1(10.058,-92.375) ; TP29.TP@26.137,-37.028 26.137,-35.911 v1(26.746,-35.301)
Y-STEP: ATMEGA2560.60 L18.2 TP27.TP | length 90.6
  Top Layer w0.254: ATMEGA2560.60@-4.943,-98.577 1.57,-98.577 v1(2.819,-97.328) ; v6(11.811,-93.67) 11.811,-93.366 15.011,-90.165 15.011,-84.679 13.487,-83.155 13.487,-67.458 22.174,-58.771 22.174,-48.255 27.813,-42.616 27.813,-38.044 29.794,-36.063 29.794,-35.301 ; L18.2@29.794,-33.91 29.794,-35.301 ; v1(30.861,-35.301) 29.794,-35.301
  Bottom Layer w0.254: v1(2.819,-97.328) 3.734,-97.328 6.325,-94.737 10.744,-94.737 v6(11.811,-93.67) ; v1(30.861,-35.301) 32.233,-36.673 TP27.TP@32.233,-37.028
Y-STOP: ATMEGA2560.57 Y0.11 | length 132.2
  Top Layer w0.254: ATMEGA2560.57@-4.943,-97.078 0.021,-97.078 v5(2.515,-94.585) ; v1(9.525,-91.689) 9.677,-91.537 11.049,-91.537 13.03,-89.556 13.03,-84.984 12.116,-84.069 12.116,-66.543 20.193,-58.466 20.193,-47.341 24.765,-42.769 24.765,-20.671 29.267,-16.169 32.853,-16.169 33.833,-15.189 33.833,2.997 35.103,4.267 Y0.11@40.361,4.267
  Bottom Layer w0.254: v5(2.515,-94.585) 4.039,-94.585 5.41,-93.213 8.001,-93.213 v1(9.525,-91.689)
Z0-ENDSTOP: HOTEND0.20 R26.1 R27.1 | length 14.6
  Top Layer w1: HOTEND0.20@-40.234,-73.558 -40.234,-73.685 -40.234,-74.219 -34.16,-80.292 R26.1@-30.991,-80.292 R27.1@-28.847,-80.292
Z0-STOP: ATMEGA2560.56 C22.1 R27.2 | length 34.8
  Top Layer w0.254: C22.1@-26.759,-82.207 -25.103,-82.207 -23.427,-83.883 -18.974,-88.184 -18.974,-95.347 v1(-19.126,-95.499) ; v1(-6.782,-95.499) -6.782,-96.261 -6.473,-96.57 ATMEGA2560.56@-4.943,-96.57
  Top Layer w0.61: R27.2@-28.847,-82.192 -28.832,-82.207 C22.1@-26.759,-82.207
  Bottom Layer w0.254: v1(-19.126,-95.499) v1(-6.782,-95.499)
Z1-ENDSTOP: HOTEND1.20 R29.1 R30.1 | length 14
  Top Layer w0.254: R30.1@28.499,-61.224 R29.1@30.399,-63.124
  Top Layer w0.61: R29.1@30.399,-63.124 R29.1@30.614,-63.124 R29.1@31.232,-63.124
  Top Layer w1: R29.1@30.963,-63.124 36.48,-63.124 39.167,-65.811 HOTEND1.20@40.31,-65.811
Z1-STOP: ATMEGA2560.41 C23.1 R30.2 | length 54.1
  Top Layer w0.254: v1(0.838,-89.556) 1.178,-89.896 ATMEGA2560.41@1.178,-92.455 ; v1(16.231,-81.478) 16.231,-68.829 21.935,-63.124 C23.1@26.387,-63.124
  Top Layer w0.61: C23.1@26.387,-63.124 R30.2@28.499,-63.124
  Bottom Layer w0.254: v1(0.838,-89.556) 3.277,-89.556 4.343,-90.622 8.153,-90.622 10.287,-88.489 12.116,-88.489 12.878,-87.727 15.926,-87.727 16.993,-86.66 16.993,-82.393 16.231,-81.631 v1(16.231,-81.478)
Z-!EN: ATMEGA2560.76 L4.2 TP37.TP | length 22
  Top Layer w0.254: L4.2@-14.269,-117.292 -12.421,-117.292 -11.506,-116.378 ; v1(-13.03,-116.378) -11.506,-116.378 ; ATMEGA2560.76@-3.317,-107.695 -3.317,-108.494 -4.343,-109.52 -7.696,-109.52 -8.763,-110.587 -8.763,-113.635 -11.506,-116.378
  Top Layer w0.305: L4.2@-14.269,-117.292 L4.2@-13.945,-117.292
  Bottom Layer w0.305: TP37.TP@-15.723,-115.718 -13.691,-115.718 v1(-13.03,-116.378)
Z-DIR: ATMEGA2560.77 L5.2 TP36.TP | length 22.8
  Top Layer w0.254: L5.2@-14.269,-119.274 -13.335,-119.274 -12.116,-118.054 ; v1(-13.03,-118.054) -12.116,-118.054 ; ATMEGA2560.77@-2.835,-107.695 -2.835,-108.926 -4.039,-110.13 -7.391,-110.13 -8.001,-110.739 -8.001,-113.94 -12.116,-118.054
  Bottom Layer w0.254: -14.046,-118.918 -13.894,-118.918 v1(-13.03,-118.054)
  Bottom Layer w0.305: TP36.TP@-15.723,-118.918 -14.046,-118.918
Z-STEP: ATMEGA2560.75 L3.2 TP38.TP | length 18.8
  Top Layer w0.254: L3.2@-14.269,-115.311 -12.268,-115.311 -9.373,-112.416 -9.373,-110.13 -8.077,-108.834 -6.553,-108.834 -6.172,-108.453 -6.172,-107.691 -4.943,-106.462 ATMEGA2560.75@-4.943,-106.07 ATMEGA2560.75@-5.313,-106.07
  Top Layer w0.305: L3.2@-14.269,-115.311 -14.249,-115.292 v1(-14.249,-114.092)
  Bottom Layer w0.305: TP38.TP@-15.723,-112.67 -15.672,-112.67 v1(-14.249,-114.092)
Z-STOP: Z.11
pads on no net: FID3.1 IC1.5 IC1.6 IC1.7 IC2.8 IC2.24 IC3.5 IC3.6 K1.O

## Polygon pours and split planes (outlines as drawn)
EARTH on Top Layer "TopLayer-No Net 17" (solid, remove dead copper, pour order 1027): 19.355,-158.318 19.355,-164.821 22.352,-164.821 44.552,-164.821 44.552,-161.011 44.552,-158.09 42.85,-158.09 31.699,-158.09 31.699,-159.436 31.699,-159.766 25.349,-159.766 24.562,-159.766 24.562,-158.318
SUPPLY on Top Layer "TopLayer-No Net 17" (solid, remove dead copper, pour order 1025): -21.895,-47.803 -21.895,10.338 -18.466,13.767 -17.729,14.503 -17.729,19.914 -14.656,19.914 -14.605,19.964 -14.402,19.761 -14.402,13.335 -9.017,13.335 -8.89,13.462 -7.899,14.453 -7.899,20.295 -4.14,20.295 -4.089,20.244 -4.089,13.386 -4.089,6.375 -10.49,-0.025 -13.894,-3.429 -13.894,-21.031 -13.894,-32.182 -17.399,-35.687 -17.577,-35.865 -17.577,-43.078 -17.577,-47.447 -17.958,-47.828
HOTEND0 on Top Layer "TopLayer-No Net 17" (solid, remove dead copper, pour order 1026): -41.605,-54.864 -41.605,-64.11 -41.504,-64.211 -41.25,-64.465 -38.862,-64.465 -38.379,-64.465 -37.694,-65.151 -36.347,-66.497 -36.347,-75.387 -36.347,-75.413 -34.468,-77.292 -34.442,-77.318 -30.709,-77.318 -30.709,-74.143 -31.725,-73.127 -32.08,-72.771 -32.08,-69.19 -32.08,-67.412 -35.001,-64.491 -35.535,-63.957 -35.535,-58.039 -35.535,-55.143 -35.738,-54.94 -35.814,-54.864 -41.605,-54.864
SUPPLY on Top Layer "Polygon_2_Net_SUPPLY" (solid, remove dead copper, pour order 1015): 16.104,-9.876 16.104,-18.664 17.018,-18.664 17.018,-21.712 22.301,-21.712 22.301,-19.629 19.558,-19.629 19.558,-9.876
24VINA on Top Layer "Polygon_1_Net_24VINA" (solid, remove dead copper, pour order 1024): -36.322,-26.589 -30.607,-26.589 ccw(c-30.607,-25.192) -29.21,-25.192 -29.21,-24.379 ccw(c-30.607,-24.379) -30.607,-22.982 -31.728,-22.982 cw(c-31.801,-21.763) -33.02,-21.835 -33.02,-14.905 -33.934,-14.905 -33.934,-14.092 -32.868,-14.092 -32.868,-12.162 -36.322,-12.162
24VBF on Top Layer "Polygon_1_Net_24VBF" (solid, remove dead copper, pour order 1010): -31.928,-9.85 -27.356,-9.85 -27.356,-16.404 -30.404,-16.404 -30.404,-14.727 -29.337,-14.727 -29.337,-13.965 -30.404,-13.965 -30.404,-12.441 -31.928,-12.441
HOTEND0 on Top Layer "Polygon_1_Net_HOTEND0" (solid, remove dead copper, pour order 1014): -24.419,-70.166 -24.419,-77.431 -32.293,-77.431 -32.293,-73.672 -28.026,-73.672 -28.026,-70.166
HOTEND1 on Top Layer "Polygon_2_Net_HOTEND1" (solid, remove dead copper, pour order 1021): 30.378,-65.553 35.077,-65.553 35.077,-69.21 30.378,-69.236 30.378,-65.553
HOTEND1 on Top Layer "Polygon_1_Net_HOTEND1" (solid, remove dead copper, pour order 1013): 23.571,-72.919 23.571,-65.502 31.14,-65.502 31.14,-68.347 27.33,-68.347 27.33,-72.919
LFAN1 on Top Layer "Polygon_2_Net_LFAN1" (solid, remove dead copper, pour order 1006): 30.861,-75.459 34.976,-75.459 34.976,-77.414 30.861,-77.414 30.861,-75.459
LFAN1 on Top Layer "Polygon_1_Net_LFAN1" (solid, remove dead copper, pour order 1008): 31.852,-75.306 28.042,-75.306 28.042,-78.202 30.328,-78.202 30.328,-77.44 31.852,-77.44
OUT on Top Layer "Polygon_1_Net_OUT" (solid, remove dead copper, pour order 1016): -6.502,-59.355 -6.502,-55.291 -11.532,-55.291 -11.532,-48.585 -16.053,-48.585 -16.053,-59.355
+5V on Top Layer "Polygon_1_Net_+5V" (solid, remove dead copper, pour order 1019): -13.31,-60.473 4.622,-60.473 4.69,-71.112 -8.28,-71.268 -8.28,-69.175 -13.31,-69.175
GND on Top Layer "Polygon_4_Net_GND" (solid, remove dead copper, pour order 1009): -0.356,-25.878 3.404,-25.878 3.404,-29.231 4.013,-29.231 4.013,-31.618 -0.356,-31.618
GND on Top Layer "Polygon_1_Net_GND" (solid, remove dead copper, pour order 1023): 7.587,-60.117 -16.663,-60.184 -16.576,-41.832 -6.756,-41.832 -6.756,-37.765 7.211,-37.803
GND on Top Layer "TopLayer-No Net 17" (solid, remove dead copper, pour order 1000): -45.72,-165.862 44.958,-165.862 46.482,-164.338 46.736,-164.084 46.736,26.162 -45.466,26.162 -47.752,23.876
+5V on Bottom Layer "TopLayer-No Net 17" (solid, remove dead copper, pour order 1029): -15.662,-72.461 -21.997,-85.259 -21.845,-101.621 -20.472,-101.981 -20.165,-135.708 -20.165,-164.236 18.364,-164.236 18.364,-143.281 18.364,-143.18 26.441,-143.18 26.873,-143.18 26.873,-133.777 26.873,-115.895 31.597,-115.895 31.597,-84.947 31.75,-84.947 30.124,-84.947 30.124,-113.817 26.746,-113.817 23.927,-113.817 23.927,-115.672 23.927,-139.37 17.196,-139.37 14.554,-139.37 14.554,-157.683 14.554,-160.147 9.169,-160.147 -17.475,-160.147 -17.475,-156.413 -17.475,-133.909 -18.136,-133.909 -18.593,-133.909 -18.593,-131.902 -18.593,-86.614 -18.694,-86.614 -11.76,-70.866 -13.462,-68.58 -15.662,-72.461
SUPPLY on Bottom Layer "Polygon_3_Net_SUPPLY" (solid, remove dead copper, pour order 1007): 16.104,-9.571 19.558,-9.571 19.558,-12.111 16.104,-12.111
GND on Bottom Layer "Polygon_1_Net_GUARD" (solid, remove dead copper, pour order 1018): 2.591,-86.736 2.591,-88.62 ccw(c3.378,-88.54) 3.458,-89.327 6.756,-89.327 ccw(c6.756,-88.768) 7.315,-88.768 7.315,-86.736 10.566,-86.736 ccw(c10.566,-86.025) 11.278,-86.025 11.278,-77.846 ccw(c10.566,-77.846) 10.566,-77.135 -0.203,-77.135 ccw(c-0.203,-77.846) -0.914,-77.846 -0.914,-86.025 ccw(c-0.203,-86.025) -0.203,-86.736
+5V on Bottom Layer "Polygon_7_Net_+5V" (solid, remove dead copper, pour order 1012): 12.548,-37.308 -1.93,-37.308 -1.93,-28.773 -3.099,-28.773 -3.099,-38.629 12.548,-38.629
+5V on Bottom Layer "Polygon_6_Net_+5V" (solid, remove dead copper, pour order 1017): 29.769,-12.619 22.962,-12.619 22.962,-37.241 -1.27,-37.241 -1.27,-63.614 -0.102,-62.64 -0.102,-38.563 24.435,-38.715 24.435,-15.616 29.769,-15.616
+5V on Bottom Layer "Polygon_5_Net_+5V" (solid, remove dead copper, pour order 1011): -1.93,-71.949 -1.93,-87.905 -1.321,-87.905 -1.321,-95.169 -2.837,-95.169 -2.837,-71.525
+5V on Bottom Layer "Polygon_3_Net_+5V" (solid, remove dead copper, pour order 1022): -12.712,-63.622 -27.991,-50.483 -27.991,-48.433 -29.921,-48.433 -29.921,-51.668 -13.609,-65.057
+5V on Bottom Layer "Polygon_2_Net_+5V" (solid, remove dead copper, pour order 1020): -15.662,-61.387 5.356,-61.387 5.512,-72.461 -15.662,-72.461
GND on Bottom Layer "TopLayer-No Net 17" (solid, remove dead copper, pour order 1001): -45.466,25.654 -45.974,25.146 -45.974,-165.862 44.704,-165.862 45.212,-165.354 46.228,-164.338 46.228,26.162

## Keep-outs
Keep-Out Layer:
  lines w0.1: -42.5,-165.046 42.5,-165.046 ; -42.5,25 42.5,25 ; -42.46,-165.04 cw(c-42.46,-162.5) -45,-162.5 -45,22.454 cw(c-42.46,22.454) -42.46,24.994 ; 42.46,-165.04 ccw(c42.46,-162.5) 45,-162.5 45,22.454 ccw(c42.46,22.454) 42.46,24.994

## Other copper
Top Layer:
  rectangle net +24V: 28.397,-73.863 31.115,-69.672
  region net +24V: 21.971,18.517 21.971,24.206 19.888,24.206 19.888,18.517
  region net +24V: -39.472,-127.686 -44.729,-127.686 -44.729,-129.769 -39.472,-129.769
  region net +24V: -39.395,-122.428 -43.002,-122.428 -43.002,-124.511 -39.395,-124.511
  region net +24V: -39.472,-117.526 -43.078,-117.526 -43.078,-119.609 -39.472,-119.609
  region net +24V: -39.472,-87.351 -43.078,-87.351 -43.078,-89.433 -39.472,-89.433
  region net +24V: -39.522,-76.911 -43.129,-76.911 -43.129,-78.994 -39.522,-78.994
  region net +24V: -39.472,-82.271 -43.078,-82.271 -43.078,-84.353 -39.472,-84.353
  region net +24V: -39.472,-70.129 -43.078,-70.129 -43.078,-72.212 -39.472,-72.212
  region net +24V: -39.472,-67.589 -43.078,-67.589 -43.078,-69.672 -39.472,-69.672
  region net +24V: -39.472,-52.349 -43.078,-52.349 -43.078,-54.432 -39.472,-54.432
  region net +24V: -39.472,-47.269 -43.078,-47.269 -43.078,-49.352 -39.472,-49.352
  region net +24V: -39.472,-42.189 -43.078,-42.189 -43.078,-44.272 -39.472,-44.272
  region net +24V: -39.446,5.512 -43.053,5.512 -43.053,3.429 -39.446,3.429
  region net +24V: -39.446,10.592 -43.053,10.592 -43.053,8.509 -39.446,8.509
  region net +24V: -39.446,15.672 -43.053,15.672 -43.053,13.589 -39.446,13.589
  region net +24V: -39.472,13.614 -39.472,17.221 -41.554,17.221 -41.554,13.614
  rectangle net +24V: -44.729,-129.362 -42.418,18.491
  rectangle net +24V: -44.729,16.662 -34.315,18.491
  rectangle net +24V: -37.109,16.662 -34.315,24.638
  rectangle net +24V: -37.109,22.682 38.125,24.638
  rectangle net +24V: 35.484,16.358 38.125,24.638
  rectangle net +24V: 35.56,16.383 44.628,18.821
  rectangle net +24V: 39.573,-11.989 43.18,-9.906
  rectangle net +24V: 39.573,-17.069 43.18,-14.986
  rectangle net +24V: 39.573,-22.149 43.18,-20.066
  rectangle net +24V: 39.573,-52.07 43.18,-49.987
  rectangle net +24V: 39.573,-57.15 43.18,-55.067
  rectangle net +24V: 39.573,-62.23 43.18,-60.147
  rectangle net +24V: 39.573,-70.307 43.18,-67.31
  rectangle net +24V: 39.573,-71.933 43.18,-69.85
  rectangle net +24V: 39.573,-87.173 43.18,-85.09
  rectangle net +24V: 39.573,-92.253 43.18,-90.17
  rectangle net +24V: 39.573,-97.333 43.18,-95.25
  rectangle net +24V: 39.573,-145.136 43.18,-143.053
  rectangle net +24V: 39.573,-150.216 43.18,-148.133
  rectangle net +24V: 42.266,-155.042 44.628,18.821
  rectangle net HOTEND1: 37.998,-84.48 41.478,-74.93
  rectangle net 111: -0.102,17.475 6.858,21.234
  rectangle net 111: -0.102,-23.47 3.048,21.234
  rectangle net 111: -0.025,-23.419 4.623,-20.523
  rectangle net HOTEND1: 36.22,-77.038 41.25,-74.879
  rectangle net HOTEND1: 36.144,-77.013 38.227,-69.774
  rectangle net HOTEND1: 32.588,-73.482 37.16,-65.583
  rectangle net LFAN1: 34.798,-104.14 41.529,-100.406
  rectangle net LFAN1: 33.172,-104.165 34.976,-75.459
  rectangle net +24V: -31.775,-72.568 -29.134,-69.698
  rectangle: 21.59,-152.146 22.606,-149.606
  rectangle net GND: 20.422,-157.937 22.606,-156.159
  region net +24V: -31.775,-72.568 -31.013,-73.33 -29.21,-73.33 -29.21,-72.644 -29.134,-72.568 -29.907,-71.795 -29.907,-70.993
  region net GND: -20.641,-122.885 -20.692,-122.936 -23.114,-122.936 -23.876,-123.698 -23.876,-145.034 -21.59,-147.32 -19.05,-147.32 -18.288,-148.082 -17.272,-147.066 -17.272,-122.936
Bottom Layer:
  rectangle net +5V: 25.451,-122.174 41.504,-120.294
  rectangle net +5V: -21.742,-146.101 -18.974,-103.424
  rectangle net +5V: -28.575,-104.089 -19.914,-101.702
  rectangle net +5V: 26.137,-127.356 41.478,-125.146
  rectangle net +5V: 31.166,-115.138 41.605,-113.005
  region net +24V: 41.732,-70.079 29.87,-70.079 29.87,-71.958 41.732,-71.958
  rectangle net +24V: -41.631,-71.984 -30.302,-70.104

## Silkscreen, mask and mechanical layers (free items; w line width, h text height)
Top Overlay:
  lines w0.203: -24.308,-69.286 -23.851,-69.744 ; 20.65,-36.063 23.241,-36.063 23.241,-31.796 20.65,-31.796 20.65,-36.063 ; 20.65,-30.882 23.241,-30.882 23.241,-26.614 20.65,-26.614 20.65,-30.882 ; 25.832,-98.7 29.185,-98.7 29.185,-87.727 25.832,-87.727 25.832,-98.7
  lines w0.254: -17.958,-148.693 -17.196,-147.931 -11.405,-147.931 ; -7.442,-148.084 -2.565,-148.084 -1.803,-148.846 ; 0.584,-148.846 1.346,-148.084 5.461,-148.084 ; 10.185,-148.084 15.519,-148.084 16.434,-148.998 ; 20.193,-18.385 20.65,-18.994 ; 20.65,-17.318 20.65,-18.994 ; 21.107,-18.385 20.65,-18.994 ; -31.623,-164.543 -20.498,-164.543 -20.498,-157.228 -31.623,-157.228 -31.623,-164.543 ; -17.872,-154.942 -1.87,-154.942 -1.87,-150.37 -17.872,-150.37 -17.872,-154.942 ; 0.365,-154.942 0.365,-150.37 16.367,-150.37 16.367,-154.942 0.365,-154.942 ; 18.995,-13 18.995,-1 30.995,-1 30.995,-13 18.995,-13
  text "QR sticker" at 23.651,-3.993 h1.57 r270
  text "here!" at 25.175,-5.759 h1.57 r270
  text "Jumper" at 18.932,-15.893 h1.26
  text "to 5V" at 19.501,-17.112 h1.26
  text "k" at 5.867,-18.08 h1.26 r270
  text "k" at 8.458,-19.452 h1.26 r270
  text "MAX" at 22.076,-27.573 h1.26 r270
  text "+24V" at 17.602,-27.681 h1.26
  text "2A" at 20.856,-28.075 h1.26 r270
  text "GND" at 17.45,-30.272 h1.26
  text "500mA" at 20.856,-32.167 h1.26 r270
  text "MAX" at 22.076,-32.755 h1.26 r270
  text "+5V" at 17.602,-32.863 h1.26
  text "k" at -28.27,-33.777 h1.26 r270
  text "GND" at 17.45,-35.911 h1.26
  text "k" at 5.105,-36.978 h1.26 r270
  text "k" at -23.698,-70.201 h1.26
  text "k" at -32.233,-70.658 h1.26 r270
  text "k" at 31.166,-70.963 h1.26 r270
  text "k" at -32.233,-71.42 h1.26 r270
  text "k" at 31.166,-72.334 h1.26 r270
  text "k" at 23.698,-74.163 h1.26
  text "+5V" at -7.997,-83.85 h1.26 r270
  text "+5V" at -14.855,-84.612 h1.26 r270
  text "GND" at -14.855,-87.05 h1.26 r270
  text "GND" at -7.692,-87.66 h1.26 r270
  text "k" at -2.819,-88.489 h1.26
  text "13" at 24.613,-88.794 h1.26 r270
  text "SCL" at -14.855,-89.794 h1.26 r270
  text "RX" at -7.692,-90.403 h1.26 r270
  text "12" at 24.613,-91.232 h1.26 r270
  text "SDA" at -14.855,-92.232 h1.26 r270
  text "TX" at -7.692,-92.842 h1.26 r270
  text "11" at 24.613,-93.823 h1.26 r270
  text "*" at 14.097,-94.737 h3.94
  text "10" at 24.613,-96.414 h1.26 r270
  text "k" at 23.546,-116.988 h1.26 r270
  text "k" at 4.496,-120.95 h1.26
  text "k" at 17.145,-133.752 h1.26 r270
  text "k" at 26.746,-133.752 h1.26 r270
  text "GND" at -17.329,-149.908 h1.26
  text "MI" at -14.281,-149.908 h1.26
  text "CLK" at -12.3,-149.908 h1.26
  text "MO" at -9.405,-149.908 h1.26
  text "SS" at -6.661,-149.908 h1.26
  text "+5V" at -4.528,-149.908 h1.26
  text "GND" at 0.67,-149.912 h1.26
  text "RST" at 3.413,-149.912 h1.26
  text "GND" at 5.851,-149.912 h1.26
  text "RX" at 8.899,-149.912 h1.26
  text "TX" at 11.49,-149.912 h1.26
  text "+5V" at 13.624,-149.912 h1.26
  text "2020-6-23" at -1.27,-163.576 h1
  text "blue" at -30.861,-164.086 h1.26
  text "red" at -28.118,-164.086 h1.26
  text "grn" at -25.527,-164.086 h1.26
  text "24V" at -23.089,-164.086 h1.26
Mechanical 8:
  lines w0.203: -22.708,15.143 -15.85,15.143 ; -11.43,15.143 -5.029,15.143 ; -7.239,-17.928 10.135,-17.928 10.135,-6.498 -7.239,-6.498 -7.239,-17.928
  text "GND" at -19.202,15.905 h1.57
  text "HB" at -3.581,-16.861 h1.57
  text "THERM" at 4.343,-16.861 h1.57
  text "+24V" at 9.83,-16.861 h1.57
  text "+24V" at -18.669,-17.166 h1.57
  text "GND" at -14.707,-17.166 h1.57
  text "+24V" at -10.135,-17.166 h1.57
  text "Y0" at 36.805,-20.976 h2.99 r270
  text "CERN-OHL" at -5.37,-45.479 h1.18 r270
  text "X0" at -37.805,-46.274 h2.99 r270
  text "X1" at 36.652,-46.274 h3.15 r270
  text "Released under" at -6.5,-46.461 h1.18 r270
  text "Oct 2016 - REV_G" at -20.066,-64.308 h1.89 r270
  text "___________________" at -15.985,-64.416 h1.89 r270
  text "Designed in Barcelona" at -14.156,-64.416 h1.89 r270
  text "MainBoard v1.0" at -12.328,-64.416 h1.89 r270
  text "BCN3D Electronics" at -10.499,-64.416 h1.89 r270
  text "BCN3D Technologies" at -8.67,-64.416 h1.89 r270
  text "E1" at 36.805,-99.462 h3.15 r270
  text "E0" at -38.347,-99.766 h3.15 r270
  text "Z" at -37.957,-121.407 h3.15 r270
Mechanical 16:
  lines w0.102: -29.955,-159.688 -29.447,-160.196 -29.447,-159.18 -28.939,-159.688 -29.955,-159.688 ; -25.555,-159.688 -25.047,-160.196 -25.047,-159.18 -24.539,-159.688 -25.555,-159.688

## Text inside footprints (layer, text, board x,y; h text height)
+5V: Top Overlay "1" at 10.424,-26.935 h1.97 r270; Top Overlay "2" at 10.424,-29.475 h1.97 r270
+24V: Top Overlay "2" at 10.424,-34.614 h1.97 r270; Top Overlay "1" at 10.424,-32.074 h1.97 r270
ATMEGA2560: Top Overlay "*" at 12.253,-106.07 h1.97 r180; Top Overlay "*" at 12.253,-106.07 h1.97 r180
STAT: Top Overlay "+" at 9.419,-121.702 h0.86 r90